# Altium PCB Auxillary_Supply_UCC28740.PcbDoc
Units mm, origin at the board's own origin, x right, y up, seen from the top; angles counter-clockwise.
Board outline 100 x 50 mm, 2 copper layers (Top Layer, Bottom Layer); 76 components, 39 nets, 241 pads, 246 vias.
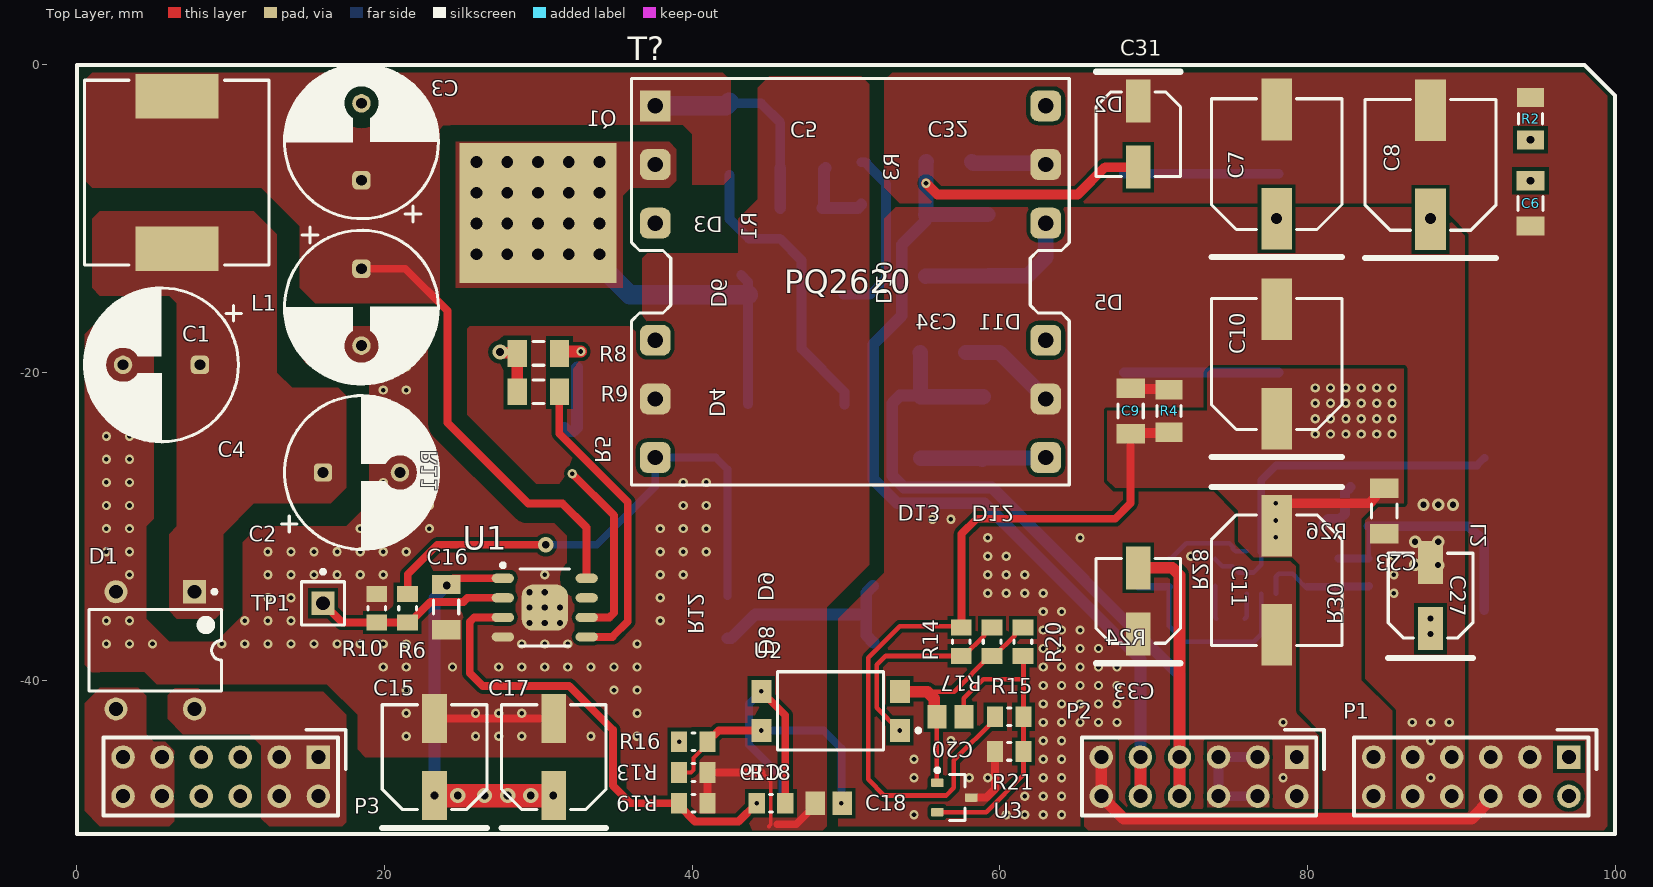
[diagram p0: Top Layer view]
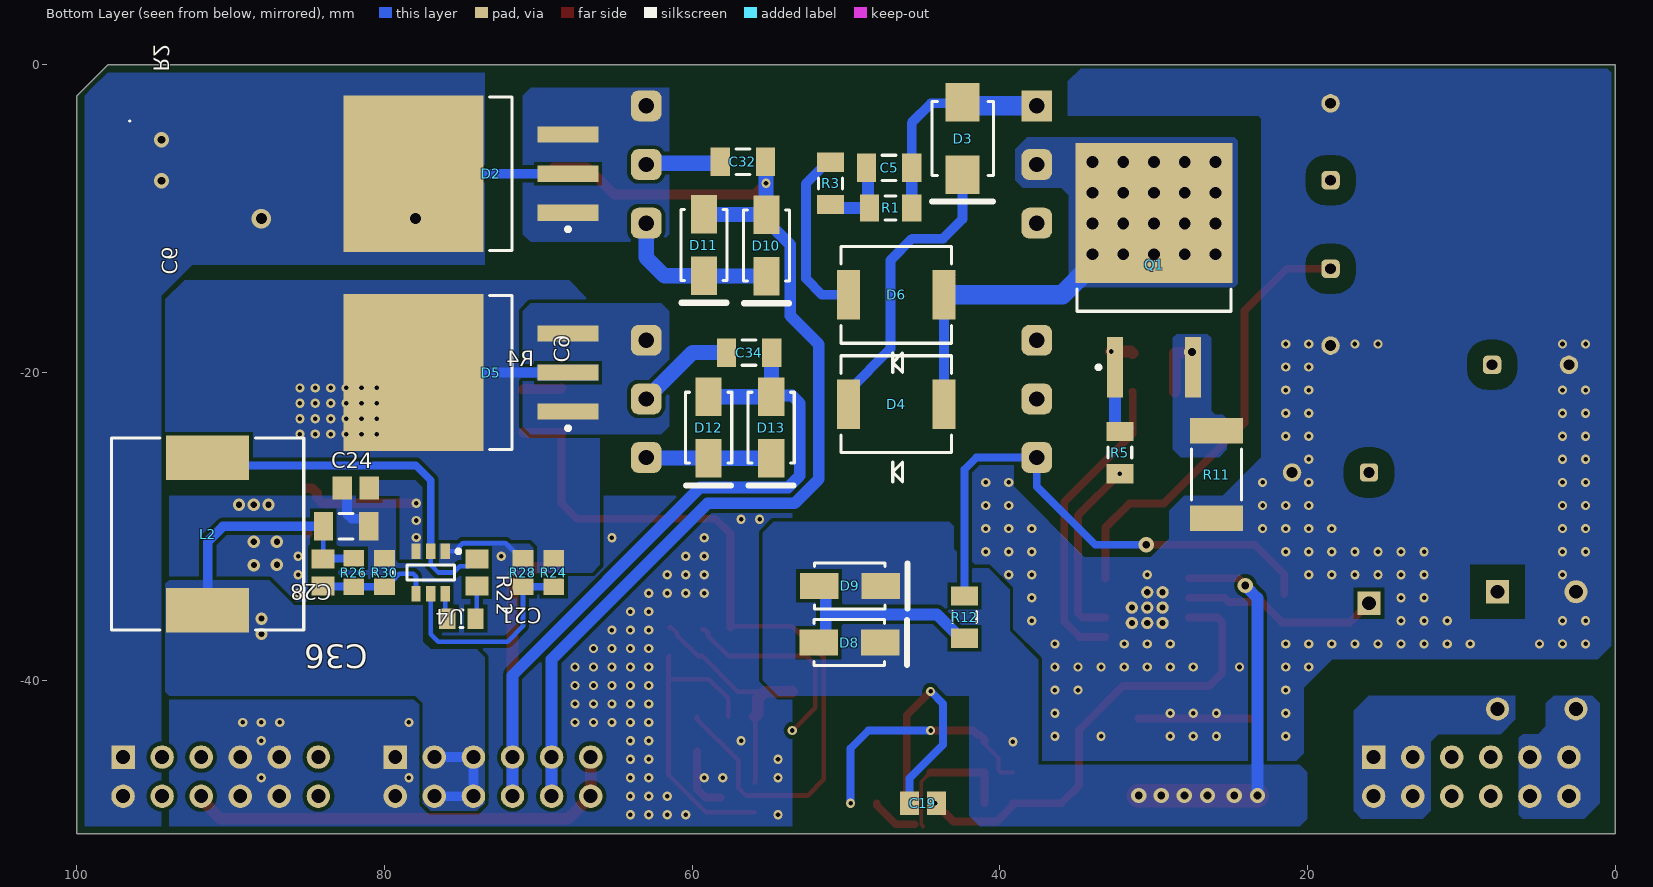
[diagram p1: Bottom Layer view, seen from below]
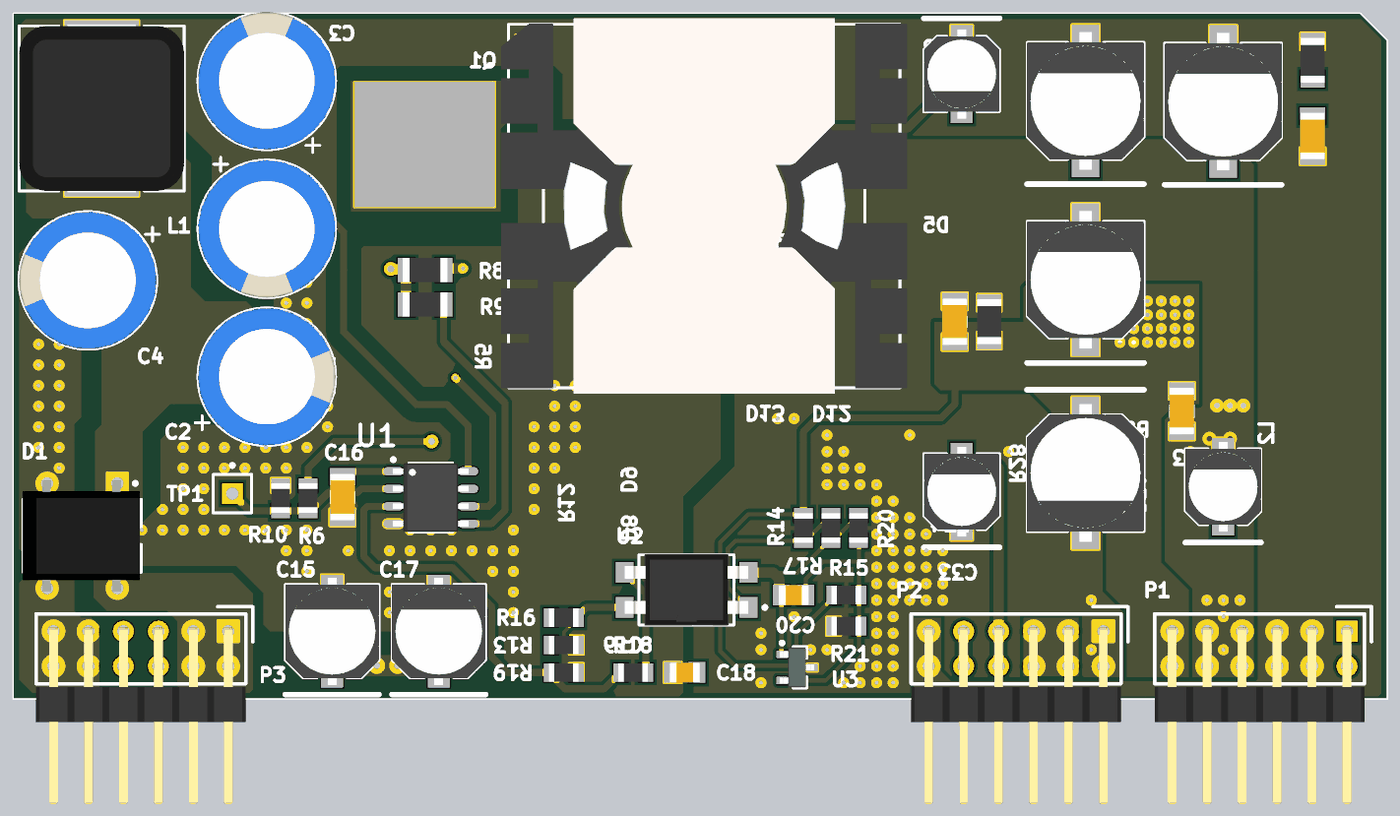
[diagram p2: 3D render of the assembled board from above, using the file's embedded part models]
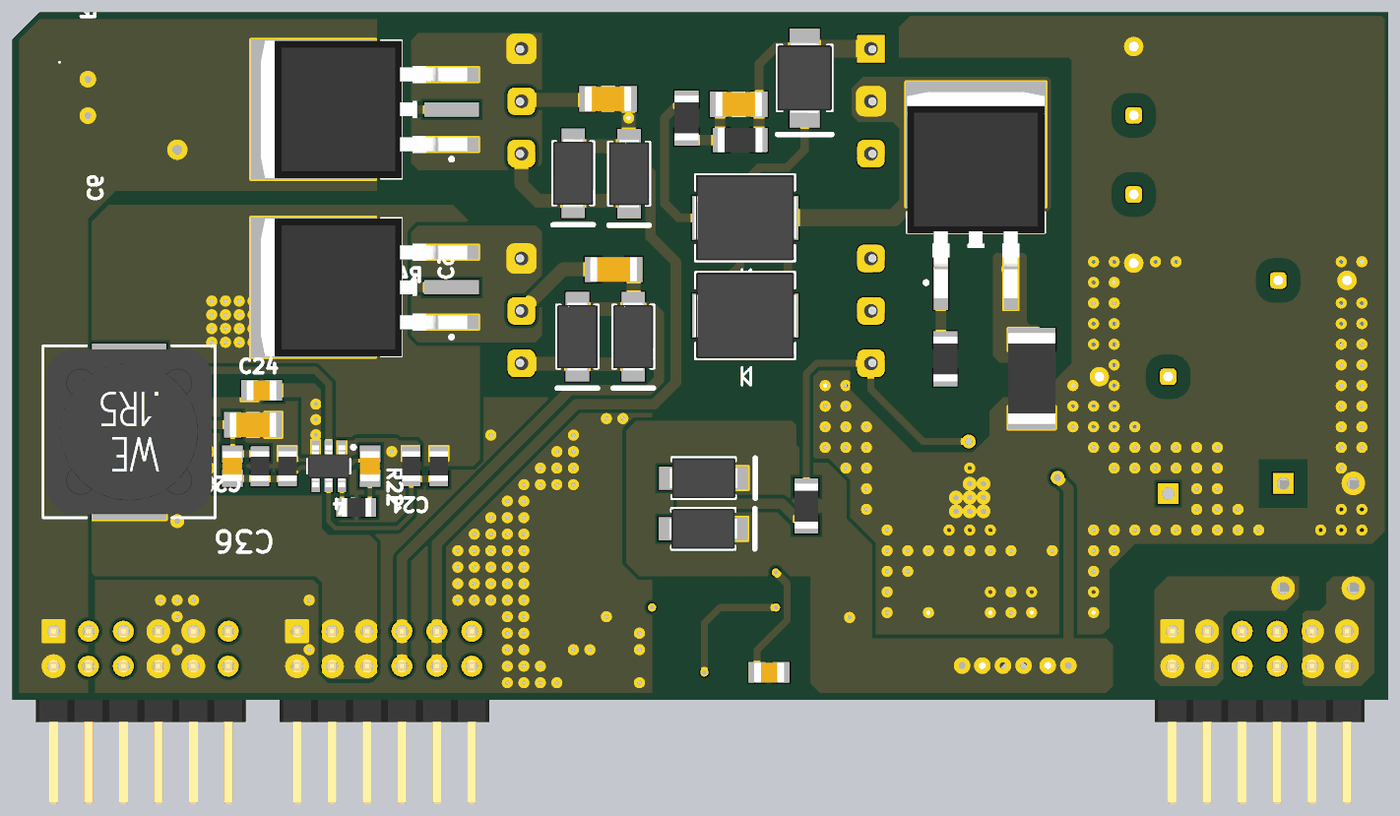
[diagram p3: 3D render of the assembled board from below, using the file's embedded part models]

## Layer stack, top to bottom
Top Solder: solder mask 0.0254, SM-001, Dk 4
Top Layer: signal copper 0.0356
Dielectric 1: dielectric 0.32, FR-4, Dk 4.8
Bottom Layer: signal copper 0.0356
Bottom Solder: solder mask 0.0254, SM-001, Dk 4

## Board outline
0,-50 0,0 98,0 100,-2 100,-50

## Design rules (kind name [scope] priority, off if disabled: settings)
AssemblyTestPointUsage [InNet('No Net')] p1:
AssemblyTestpoint [InNet('No Net')] p1: testpointundercomponent=TRUE minsize=1.016 maxsize=2.54 preferedsize=1.524 minholesize=0 maxholesize=1.016 preferedholesize=0.813 testpointgrid=0.025 usegrid=TRUE gridtolerance=0 allowsidetop=TRUE allowsidebottom=TRUE
Clearance "Schematic Clearance Constraint" [InNetClass('HV')] p1: gap=1.016 ignorepadtopadclearanceinfootprint=FALSE except(0.635: Arc-SMDPad Arc-Via Track-SMDPad Track-Via SMDPad-SMDPad SMDPad-Via)
Clearance Clearance_9 [All] p2: gap=0.254 ignorepadtopadclearanceinfootprint=FALSE except(0: Arc-Hole Track-Hole SMDPad-Hole THPad-Hole Via-Hole Fill-Hole Poly-Hole Region-Hole Text-Hole)
Clearance Clearance_8 [InNamedPolygon('GNDB')] p3: gap=0.254 ignorepadtopadclearanceinfootprint=FALSE except(0: Arc-Hole Track-Hole SMDPad-Hole THPad-Hole Via-Hole Fill-Hole Poly-Hole Region-Hole Text-Hole)
Clearance Clearance_7 [InNamedPolygon('GNDB')] p4: gap=0.254 ignorepadtopadclearanceinfootprint=FALSE except(0: Arc-Hole Track-Hole SMDPad-Hole THPad-Hole Via-Hole Fill-Hole Poly-Hole Region-Hole Text-Hole)
Clearance Clearance_6 [InNamedPolygon('GNDB')] p5: gap=0.254 ignorepadtopadclearanceinfootprint=FALSE except(0: Arc-Hole Track-Hole SMDPad-Hole THPad-Hole Via-Hole Fill-Hole Poly-Hole Region-Hole Text-Hole)
Clearance Clearance_5 [InNamedPolygon('GND_AUX')] p6: gap=0.254 ignorepadtopadclearanceinfootprint=FALSE except(0: Arc-Hole Track-Hole SMDPad-Hole THPad-Hole Via-Hole Fill-Hole Poly-Hole Region-Hole Text-Hole; 1.27: Arc-Fill Arc-Poly Arc-Region Track-Fill Track-Poly Track-Region SMDPad-Fill SMDPad-Poly SMDPad-Region THPad-Fill THPad-Poly THPad-Region Via-Fill Via-Poly Via-Region Fill-Fill Fill-Poly Fill-Region Poly-Poly Poly-Region Region-Region)
Clearance Clearance_4 [InNamedPolygon('GNDAUX')] p7: gap=0.508 ignorepadtopadclearanceinfootprint=FALSE except(0: Arc-Hole Track-Hole SMDPad-Hole THPad-Hole Via-Hole Fill-Hole Poly-Hole Region-Hole Text-Hole; 0.254: Arc-Arc Arc-Track Arc-Via Arc-Text Track-Track Track-Via Track-Text SMDPad-Via SMDPad-Text THPad-THPad THPad-Via THPad-Text Via-Via Via-Text Fill-Text Poly-Text Region-Text Text-Text)
Clearance Clearance_3 [InNamedPolygon('NONET_L01_P003')] p8: gap=0.254 ignorepadtopadclearanceinfootprint=FALSE except(0: Arc-Hole Track-Hole SMDPad-Hole THPad-Hole Via-Hole Fill-Hole Poly-Hole Region-Hole Text-Hole; 1: Arc-Fill Arc-Poly Arc-Region Track-Fill Track-Poly Track-Region SMDPad-Fill SMDPad-Poly SMDPad-Region THPad-Fill THPad-Poly THPad-Region Via-Fill Via-Poly Via-Region Fill-Fill Fill-Poly Fill-Region Poly-Poly Poly-Region Region-Region)
Clearance Clearance_2 [InNamedPolygon('HV1')] p9: gap=0.254 ignorepadtopadclearanceinfootprint=FALSE except(0: Arc-Hole Track-Hole SMDPad-Hole THPad-Hole Via-Hole Fill-Hole Poly-Hole Region-Hole Text-Hole)
Clearance Soldermask [InNamedPolygon('Top')] p10: gap=0.254 ignorepadtopadclearanceinfootprint=FALSE except(0: Arc-Hole Track-Hole SMDPad-Hole THPad-Hole Via-Hole Fill-Hole Poly-Hole Region-Hole Text-Hole; 0.5: Arc-Poly Track-Fill Track-Poly SMDPad-Fill SMDPad-Poly THPad-Fill THPad-Poly Via-Fill Via-Poly Fill-Fill Fill-Poly Poly-Poly)
Clearance Clearance_1 [InNamedPolygon('Top')] p11: gap=0.254 ignorepadtopadclearanceinfootprint=FALSE except(0: Arc-Hole Track-Hole SMDPad-Hole THPad-Hole Via-Hole Fill-Hole Poly-Hole Region-Hole Text-Hole; 0.5: Arc-Arc Arc-Track Track-Track)
Clearance [InNet('No Net')] p12: gap=0.254 ignorepadtopadclearanceinfootprint=FALSE except(0: Arc-Hole Track-Hole SMDPad-Hole THPad-Hole Via-Hole Fill-Hole Poly-Hole Region-Hole Text-Hole)
FabricationTestPointUsage [All] p1: valid=0 allowmultiple=TRUE
FabricationTestpoint [All] p1: side=3 testpointundercomponent=FALSE minsize=1.016 maxsize=2.54 preferedsize=1.524 minholesize=0 maxholesize=1.016 preferedholesize=0.813 testpointgrid=0.025 allowsidetop=TRUE allowsidebottom=TRUE usegrid=TRUE gridtolerance=0
Height [All] p1: minheight=0 maxheight=27.94 prefheight=12.7
MinimumSolderMaskSliver [All] p1: minsoldermaskwidth=0.127
PolygonConnect [All] p1: connectstyle=Direct reliefconductorwidth=0.254 reliefentries=4 polygonreliefangle="90 Angle" airgapwidth=0.254
RoutingVias [All] p1: holewidth=0.3 width=0.6 viastyle="Through Hole" minholewidth=0.3 minwidth=0.6 maxholewidth=1 maxwidth=2
SilkToSilkClearance [All] p1: silktosilkclearance=0.2
SilkToSolderMaskClearance [IsPad] p1: minsilkscreentomaskgap=0.2 clearancetoexposedcopper=TRUE
SolderMaskExpansion [All] p1: expansion=0.102 istentingtop=FALSE
UnRoutedNet [All] p1: checkbadconnections=TRUE
Width [All] p1: maxlimit=1.524 minlimit=0.254 preferedwidth=0.762 minimp=50.000000 maximp=50.000000 favimp=50.000000
21 further rules are at their usual default settings.

## Classes and differential pairs
net class HV: HV LIVE NetC1_1 NetD4_1

## Components (designator, comment, footprint, x,y, rotation, side; value= is the part's Value field where it differs from the comment)
C1 "400V" 10UF_400V 8,-19.5 r180 top value=10uF
C2 "400V" 10UF_400V 16,-26.5 r0 top value=10uF
C3 "400V" 10UF_400V 18.5,-7.5 r90 top value=10uF
C4 "400V" 10UF_400V 18.5,-13.25 r270 top value=10uF
C5 "Cap_1206" CHIP_CAP_1206 47.2,-6.7 r180 bottom value=100pF
C6 "Cap_1206" CHIP_CAP_1206 94.5,-9 r90 top value=100pF
C7 "100uF" PNSC-FK-V-F_V 78,-6.45 r90 top
C8 "100uF" PNSC-FK-V-F_V 88,-6.5 r90 top
C9 "Cap_1206" CHIP_CAP_1206 68.5,-22.5 r270 top value=100pF
C10 "100uF" PNSC-FK-V-F_V 78,-19.45 r90 top
C11 "100uF" PNSC-FK-V-F_V 78,-33.5 r270 top
C15 "47uF" PNSC-FP-V-D_V 23.25,-45 r90 top
C16 "Cap_1206" CHIP_CAP_1206 24,-35.25 r90 top value=100nF
C17 "47uF" PNSC-FP-V-D_V 31,-45 r90 top
C18 "Cap_0805" CHIP_CAP_0805 48.875,-48 r0 top value=100pF
C19 "Cap_0805" CHIP_CAP_0805 45,-48 r180 bottom value=100pF
C20 "Cap_0805" CHIP_CAP_0805 56.79,-42.38 r0 top value=100pF
C21 "Cap_0805" CHIP_CAP_0805 74,-33 r90 bottom value=100pF
C23 "Cap_1206" CHIP_CAP_1206 85,-29 r270 top value=10uF
C24 "Cap_0805" CHIP_CAP_0805 81.875,-27.5 r0 bottom value=100pF
C27 "EEEFP1E220AR" PNSC-FP-V-C_V 88,-34.5 r90 top
C28 "Cap_1206" CHIP_CAP_1206 82.5,-30 r180 bottom value=100nF
C31 "EEEFP1E220AR" PNSC-FP-V-C_V 69,-4.5 r270 top
C32 "Cap_1206" CHIP_CAP_1206 56.7,-6.3 r180 bottom value=100nF
C33 "EEEFP1E220AR" PNSC-FP-V-C_V 69,-34.85 r90 top
C34 "Cap_1206" CHIP_CAP_1206 56.3,-18.7 r180 bottom value=100nF
C36 "Cap_0805" CHIP_CAP_0805 84,-33 r90 bottom value=100pF
D1 "DF10M" DF10M 5.09,-38.062 r270 top
D2 "STPS3030C6" DPAK254P1542X450-4N 74.422,-7.074 r0 bottom
D3 "SMBJ33A" FAIR-DO-214AA-2_V 42.418,-4.788 r270 bottom
D4 "SS36-E3/57T" VISH-DO-214AB-2_V 46.736,-22.06 r0 bottom
D5 "STPS3030C6" DPAK254P1542X450-4N 74.422,-20 r0 bottom
D6 "SS36-E3/57T" VISH-DO-214AB-2_V 46.736,-14.948 r0 bottom
D8 "B360A-13-F" DIOD-B360A_V 49.784,-37.554 r180 bottom
D9 "B360A-13-F" DIOD-B360A_V 49.752,-33.871 r180 bottom
D10 "B360A-13-F" DIOD-B360A_V 55.172,-11.742 r270 bottom
D11 "B360A-13-F" DIOD-B360A_V 59.236,-11.71 r270 bottom
D12 "B360A-13-F" DIOD-B360A_V 58.928,-23.584 r270 bottom
D13 "B360A-13-F" DIOD-B360A_V 54.864,-23.584 r270 bottom
L1 "CDRH127NP-100MC" SUMI-CDRH127_V 6.5,-7 r180 top
L2 "5.6uH" WE-PD-L 91.5,-30.5 r270 bottom
P1 "Header 6X2H" HEADER_6X2 97,-45 r270 top
P2 "Header 6X2H" HEADER_6X2 79.3,-45 r270 top
P3 "Header 6X2H" HEADER_6X2 15.7,-45 r270 top
Q1 "NMOS-2" "DPAK254P1542X450-3N - THERMAL" 29.972,-13.314 r90 bottom
R1 "Res_1206" CHIP_RES_1206 47.1,-9.3 r180 bottom value=1K
R2 "Res_1206" CHIP_RES_1206 94.5,-3.5 r270 top value=10K
R3 "Res_1206" CHIP_RES_1206 51,-7.7 r270 bottom value=1K
R4 "Res_1206" CHIP_RES_1206 71,-22.5 r270 top value=10K
R5 "Res_1206" CHIP_RES_1206 32.2,-25.2 r90 bottom value=10E
R6 "Res_0805" CHIP_RES_0805 21.5,-35.325 r90 top value=105K
R8 "Res_1206" CHIP_RES_1206 30,-18.75 r0 top value=10K
R9 "Res_1206" CHIP_RES_1206 30,-21.25 r180 top value=1.5K
R10 "Res_0805" CHIP_RES_0805 19.5,-35.325 r270 top value=28.7K
R11 "Res_2512" CHIP2PINSM127P600-8N_2512 25.908,-26.632 r90 bottom value=0.56E
R12 "Res_1206" CHIP_RES_1206 42.291,-35.903 r90 bottom value=JUMPER
R13 "Res_0805" CHIP_RES_0805 40.075,-46 r0 top value=10K
R14 "Res_0805" CHIP_RES_0805 57.5,-37.5 r90 top value=1K
R15 "Res_0805" CHIP_RES_0805 60.615,-42.38 r0 top value=180K
R16 "Res_0805" CHIP_RES_0805 40.075,-44 r180 top value=1E
R17 "Res_0805" CHIP_RES_0805 59.5,-37.5 r90 top value=1K
R18 "Res_0805" CHIP_RES_0805 45.125,-48 r0 top value=205K
R19 "Res_0805" CHIP_RES_0805 40.075,-48 r180 top value=18.7K
R20 "Res_0805" CHIP_RES_0805 61.5,-37.5 r90 top value=NC
R21 "Res_0805" CHIP_RES_0805 60.615,-44.63 r0 top value=39K
R22 "Res_0805" CHIP_RES_0805 75,-36 r0 bottom value=105K
R24 "Res_0805" CHIP_RES_0805 69,-33 r90 bottom value=15.49K
R26 "Res_0805" CHIP_RES_0805 82,-33 r90 bottom value=105K
R28 "Res_0805" CHIP_RES_0805 71,-33 r270 bottom value=5.49K
R30 "Res_0805" CHIP_RES_0805 80,-33 r270 bottom value=105K
T? "PQ2620_AB" PQ26_20 50.292,-14.097 r0 top
TP1 "Test Point" PIN1 16,-35 r0 top
U1 "UCC28740-Q1" SOIC127P570X175_HS-9N 30.418,-35.282 r0 top
U2 "PC817" LTV-817 49,-42 r180 top
U3 "TL431ACDBZR" DBZ0003A_L 57.04,-47.63 r0 top
U4 "TPS56339DDCR" SOT95P278X110-6N 77,-33 r270 bottom value=Value

## Footprints (in the part's own frame and the unit in brackets; to place one, negate y for a bottom-side part, rotate by r counter-clockwise, add the part's x,y. Pads: shape width x height; smd on the part's side, far side on the other; paste and mask are expansions set on the pad)
10UF_400V [mm]
  rrect50% 1.2x1.2 hole 0.7: 1(0,0)
  round 1.2 hole 0.7: 2(5,0)
  silkscreen extent -2.7,-5 7.5,5, body extent -2.5,-5 7.5,5, height 10.5
CHIP2PINSM127P600-8N_2512 [mm]
  rect 1.65x3.45 smd: 1(-2.85,0) 2(2.85,0)
  silkscreen extent -1.65,-1.63 1.65,1.63, body extent -3.3,-1.71 3.3,1.71, height 0.8
CHIP_CAP_0805 [mm]
  rect 1.25x1.5 smd: 1(-0.875,0) 2(0.875,0)
  body extent -1.1,-0.72 1.1,0.72, height 1.2
CHIP_CAP_1206 [mm]
  rect 1.25x1.85 smd: 1(-1.475,0) 2(1.475,0)
  silkscreen extent -0.45,-0.82 0.45,0.82, body extent -1.7,-0.9 1.7,0.9, height 1.4
CHIP_RES_0805 [mm]
  rect 1.05x1.35 smd: 1(-0.925,0) 2(0.925,0)
  silkscreen extent -0.1,-0.58 0.1,0.58, body extent -1.07,-0.67 1.07,0.67, height 0.5
CHIP_RES_1206 [mm]
  rect 1.25x1.75 smd: 1(-1.375,0) 2(1.375,0)
  silkscreen extent -0.35,-0.77 0.35,0.77, body extent -1.62,-0.87 1.63,0.87, height 0.55
DBZ0003A_L [mm] "SOT23, 3-Leads, Body 3.04x1.4mm, Pitch 0.95mm, IPC High Density"
  rrect18% 0.8x0.55 smd: 1(-1.1,0.95) 2(-1.1,-0.95) 3(1.1,0)
  silkscreen extent -1.22,-1.5 0.7,1.9, body extent -1.26,-1.46 1.26,1.46, height 0.96
DF10M [mm]
  rect 1.5x1.5 hole 0.9: 1(-3.81,2.55)
  round 1.5 hole 0.9: 2(-3.81,-2.55) 3(3.81,-2.55) 4(3.81,2.55)
  silkscreen extent -3.93,-4.3 2.65,4.3, body extent -4.01,-4.32 4.01,4.18, height 3.5
DIOD-B360A_V [mm] "Molded Diode, 2-Leads, Body 4.60x2.92mm"
  rect 2.5x1.7 smd: 1(-2,0) 2(2,0)
  silkscreen extent -2.3,-1.5 3.75,1.5, body extent -2.52,-1.46 2.52,1.46, height 2.3
"DPAK254P1542X450-3N - THERMAL" [mil] "D2-PAK, 3-Pads, Body 7.60x8.36mm (max), IPC Medium Density"
  rect 155.51x41.34 smd: 1(-250,100) 3(-250,-100)
  round 60 hole 30: 2(39.37,-157.48) 2(39.37,-78.74) 2(39.37,0) 2(39.37,78.74) 2(39.37,157.48) 2(118.11,-157.48) 2(118.11,-78.74) 2(118.11,0) 2(118.11,78.74) 2(118.11,157.48) 2(196.85,-157.48) 2(196.85,-78.74) 2(196.85,0) 2(196.85,78.74) 2(196.85,157.48) 2(275.59,-157.48) 2(275.59,-78.74) 2(275.59,0) 2(275.59,78.74) 2(275.59,157.48)
  rect 358.27x401.57 smd far side: 2(145.67,0)
  rect 358.27x401.57 smd: 2(145.67,0)
  silkscreen extent -255,-197 -49,197, body extent -295,-197 295,197, height 184
DPAK254P1542X450-4N [mm] "D2-PAK, 3-Pads, Body 7.60x8.36mm (max), IPC Medium Density"
  rect 3.95x1.05 smd: 1(-6.35,-2.54) 1(-6.35,2.54) 2(-6.35,0)
  rect 9.1x10.2 smd: 2(3.7,0)
  silkscreen extent -6.47,-5 -1.25,5, body extent -7.5,-5 7.5,5, height 4.42
FAIR-DO-214AA-2_V [mm] "Molded Diode, 2-Leads, Body 4.75x3.95mm"
  rect 2.5x2.2 smd: 1(-2.35,0) 2(2.35,0)
  silkscreen extent -2.4,-2 4.1,2, body extent -2.59,-1.97 2.6,1.98, height 2.65
HEADER_6X2 [mil]
  rect 60x60 hole 35.43: 1(0,0)
  round 60 hole 35.43: 2(100,0) 3(0,-100) 4(100,-100) 5(0,-200) 6(100,-200) 7(0,-300) 8(100,-300) 9(0,-400) 10(100,-400) 11(0,-500) 12(100,-500)
  silkscreen extent -70,-550 150,70, body extent -13,-550 495,50, height 200
LTV-817 [mm]
  rect 1.3x1.5 smd: 1(-4.5,1.27) 2(-4.5,-1.27) 3(4.5,-1.27) 4(4.5,1.27)
  silkscreen extent -5.83,-2.55 3.45,2.55, body extent -4.48,-2.6 4.48,2.6, height 3.68
PIN1 [mm] "Connector; Plug"
  rect 1.5x1.5 hole 0.9: 1(0,0)
  silkscreen extent -1.4,-1.4 1.4,2.17
PNSC-FK-V-F_V [mm] "CAPAE, 2-Leads, Body 8.50x8.50mm"
  rect 4x2 smd: 1(-3.55,0) 2(3.55,0)
  silkscreen extent -6.05,-4.25 4.25,4.25, body extent -5,-4.25 5,4.25, height 10.5
PNSC-FP-V-C_V [mm] "CAPAE, 2-Leads, Body 5.50x5.50mm"
  rect 2.8x1.6 smd: 1(-2.15,0) 2(2.15,0)
  silkscreen extent -4.05,-2.75 2.75,2.75, body extent -3.25,-2.75 3.25,2.75, height 6.1
PNSC-FP-V-D_V [mm] "CAPAE, 2-Leads, Body 6.80x6.80mm"
  rect 3.2x1.6 smd: 1(-2.5,0) 2(2.5,0)
  silkscreen extent -4.6,-3.4 3.4,3.4, body extent -3.9,-3.4 3.9,3.4, height 6.1
PQ26_20 [mm]
  rect 2x2 hole 1: 1(-12.7,11.43)
  rrect50% 2x2 hole 1: 2(-12.7,7.62) 3(-12.7,3.81) 4(-12.7,-3.81) 5(-12.7,-7.62) 6(-12.7,-11.43) 7(12.7,-11.43) 8(12.7,-7.62) 9(12.7,-3.81) 10(12.7,3.81) 11(12.7,7.62) 12(12.7,11.43)
  silkscreen extent -14.22,-13.21 14.22,13.21, body extent -14.75,-13.65 14.75,13.65, height 22.65
SOIC127P570X175_HS-9N [mm] "SOIC, 8-Leads, Body 4.91x3.90mm, Pitch 1.27mm, Thermal Pad 3.00x3.00mm, IPC Medium Density"
  oval 1.45x0.6 smd: 1(-2.725,1.905) 2(-2.725,0.635) 3(-2.725,-0.635) 4(-2.725,-1.905) 5(2.725,-1.905) 6(2.725,-0.635) 7(2.725,0.635) 8(2.725,1.905)
  round 0.8 hole 0.4: 9(-1,-1) 9(-1,0) 9(-1,1) 9(0,-1) 9(0,0) 9(0,1) 9(1,-1) 9(1,0)
  rrect50% 3x3 smd: 9(0,0)
  silkscreen extent -2.85,-2.5 1.6,2.88, body extent -2.77,-2.5 2.77,2.5, height 1.75
SOT95P278X110-6N [mm] "SOT23, 6-Leads, Body 2.90x2.78mm, Pitch 0.95mm, IPC Medium Density"
  rect 1x0.6 smd: 1(-1.375,0.95) 2(-1.375,0) 3(-1.375,-0.95) 4(1.375,-0.95) 5(1.375,0) 6(1.375,0.95)
  silkscreen extent -1.5,-1.55 0.5,1.92, body extent -1.52,-1.53 1.53,1.53, height 1.1
SUMI-CDRH127_V [mm] "SMD, 2-Leads, Body 12x12mm"
  rect 5.4x2.9 smd: 1(0,4.95) 2(0,-4.95)
  silkscreen extent -6,-6 6,6, body extent -6,-6.1 6,6.1, height 8.4
VISH-DO-214AB-2_V [mm] "Molded Diode, 2-Leads, Body 7.11x6.22mm"
  rect 1.52x3.2 smd: 1(-3.105,0) 2(3.105,0)
  silkscreen extent -3.6,-3.15 3.6,5.04, body extent -3.77,-3.11 3.78,3.11, height 2.62
WE-PD-L [mm] "SMD Inductor, 2-Leads, Body 12.0 x 12.0 mm"
  rect 2.9x5.4 smd: 1(-4.95,0) 2(4.95,0)
  silkscreen extent -6.25,-6.25 6.25,6.25, body extent -6,-6 6,6, height 5.98

## Part data
C1 C2 C3 C4: library part "Cap Pol1", "Polarized Capacitor (Radial)", LatestRevisionDate=17-Jul-2002, LatestRevisionNote="Re-released for DXP Platform.", PackageDescription="Polarized Capacitor (Radial); 2 Leads", PackageReference=RB7.6-15, Published=8-Jun-2000, Publisher="Altium Limited"
C5 C6 C9 C16 C18 C19 C20 C21 C23 C24 C28 C32 C34 C36: library part Cap, "Capacitor", LatestRevisionDate=17-Jul-2002, LatestRevisionNote="Re-released for DXP Platform.", PackageDescription="Radial Cap, Thru-Hole; 2 Leads; 0.3 in Pin Spacing", PackageReference=RAD-0.3, Published=8-Jun-2000, Publisher="Altium Limited"
  C18 C19 C21 C24 C36: Size=100nF
  C20: Size=1.2nF
C7 C8 C10 C11: library part CMP-2000-06208-1, "Aluminum Electrolytic Capacitor, 100 uF, +/- 20%, 50 V, 2-Pin SMD (Size Code F), -55 to 105 degC, RoHS, Tape and Reel", Capacitance=100µF, Case Size/Dimension=Ø8x10.2mm, Lifetime@Temperature=2000Hrs@105°C, Manufacturer=Panasonic, Operating Temp Range=-55to+105°C, Operating Temp-Max=105°C, Package Description="2-Pin Electrolytic Aluminum Capacitor, Body 8.3 x 8.3 mm", Package Reference=FK-V-F, Rated Voltage=50V, Ripple Current=350mA, Datasheet URL=http://industrial.panasonic.com/cdbs/www-data/pdf/RDE0000/ABA0000C1181.pdf, Datasheet Version=03/2016, Impedance=0.34O, Manufacturer URL=http://www.panasonic.com/, Mounting Technology=SurfaceMount, Package URL=http://industrial.panasonic.com/cdbs/www-data/pdf/RDE0000/DME0000COL48.pdf, Series=FK, Type=Can
C15 C17: library part CMP-2000-06216-1, "Aluminum Electrolytic Capacitor, 47 uF, +/- 20%, 35 V, 2-Pin SMD (Size Code D), -55 to 105 degC, RoHS, Tape and Reel", Capacitance=47µF, Case Size/Dimension=Ø6.3x5.8mm, ESR (Equivalent Series Resistance)=0.26O, Lifetime@Temperature=2000Hrs@105°C, Manufacturer=Panasonic, Operating Temp Range=-55to+105°C, Operating Temp-Max=105°C, Package Description="2-Pin Electrolytic Aluminum Capacitor, Body 6.6 x 6.6 mm", Package Reference=FP-V-D, Rated Voltage=35V, Ripple Current=300mA, Datasheet URL=http://industrial.panasonic.com/cdbs/www-data/pdf/RDE0000/ABA0000C1184.pdf, Datasheet Version=03/2016, Manufacturer URL=http://www.panasonic.com/, Mounting Technology=SurfaceMount, Package URL=http://industrial.panasonic.com/cdbs/www-data/pdf/RDE0000/DME0000COL48.pdf, Series=FP, Type=Can
C27 C31 C33: library part CMP-2000-06213-1, "Aluminum Electrolytic Capacitor, 22 uF, +/- 20%, 25 V, 2-Pin SMD (Size Code C), -55 to 105 degC, RoHS, Tape and Reel", Capacitance=22µF, Case Size/Dimension=Ø5x5.8mm, ESR (Equivalent Series Resistance)=0.36O, Lifetime@Temperature=2000Hrs@105°C, Manufacturer=Panasonic, Operating Temp Range=-55to+105°C, Operating Temp-Max=105°C, Package Description="2-Pin Electrolytic Aluminum Capacitor, Body 5.3 x 5.3 mm", Package Reference=FP-V-C, Rated Voltage=25V, Ripple Current=240mA, Datasheet URL=http://industrial.panasonic.com/cdbs/www-data/pdf/RDE0000/ABA0000C1184.pdf, Datasheet Version=03/2016, Manufacturer URL=http://www.panasonic.com/, Mounting Technology=SurfaceMount, Package URL=http://industrial.panasonic.com/cdbs/www-data/pdf/RDE0000/DME0000COL48.pdf, Series=FP, Type=Can
D2 D5: library part 11DQ06, "Schottky Rectifier", Code_JEDEC=DO-204-AL, ComponentLink1Description="Manufacturer Link", ComponentLink1URL=http://www.irf.com/, ComponentLink2Description=Datasheet, ComponentLink2URL=http://www.irf.com/product-info/datasheets/data/11dq05.pdf, DatasheetVersion=Dec-1997, LatestRevisionDate=17-Jul-2002, LatestRevisionNote="Re-released for DXP Platform.", PackageDescription="Diode, Axial; Body 5.2 x 2.7 mm (LxDia. max), Lead Dia. 0.86 mm (max)", PackageReference=DO-204AL, Published=8-Jun-2000, Publisher="Altium Limited"
D3: library part CMP-2000-07095-1, "Transient Voltage Suppressor, 600 W, 33 V, -55 to 150 degC, 2-Pin SMD, RoHS, Tape and Reel", Manufacturer=FairchildSemiconductor, Maximum Clamping Voltage=53.3V, Maximum Peak Pulse Current=11.3A, Maximum Reverse Leakage Current=5uA, Maximum Reverse Stand-off Voltage=33V, Minimum Breakdown Voltage=36.7V, Operating Temperature=-55to150°C, Package=2DO-214AA, Package Description="2-Pin Surface Mount Device, Body 4.4 x 3.625 mm", Package Reference=DO-214AA-2, Peak Pulse Power Dissipation=600W, Test Current=1mA, Category=TVS, Configuration=Single, Datasheet URL=https://www.fairchildsemi.com/datasheets/SM/SMBJ33A.pdf, Datasheet Version="Rev. 1.1.1, 11/2014", Direction Type=Uni-Directional, Manufacturer URL=https://www.fairchildsemi.com/, Mounting=SurfaceMount, Mounting Technology=SurfaceMount, Packaging=Tape&Reel, Rad Hard=No
D4 D6: library part CMP-2000-07150-1, "Surface Mount Schottky Barrier Rectifier, 60 V, 3 A, -55 to 150 degC, 2-Pin SMC (DO-214AB), RoHS, Tape and Reel", Diode Case Style=DO-214AB, Forward Current If(AV)=3A, Forward Surge Current Ifsm Max=100A, Forward Voltage VF Max=750mV, Manufacturer=Vishay, Operating Temperature Max=150°C, Package Description="2-Pin Surface Mount Device, Body 6.855 x 5.905 mm", Repetitive Reverse Voltage Vrrm Max=60V, Datasheet URL=http://www.vishay.com/docs/88751/ss32.pdf, Datasheet Version=08/2015, Diode Configuration=Single, Diode Type=Schottky, Manufacturer URL=http://www.vishay.com/, Mounting Technology=SurfaceMount, No. of Pins=2Pins, Package Reference=DO-214AB, Packaging=CutTape, Product Range=-, SVHC=ToBeAdvised
D8 D9 D10 D11 D12 D13: library part CMP-2000-05898-1, "Schottky Barrier Rectifier, 3 A, -55 to 150 degC, 2-Pin Molded, RoHS, Tape and Reel", If - Forward Current=3A, Ifsm - Forward Surge Current=80A, Ir - Reverse Current=500uA, Manufacturer=DiodesIncorporated, Maximum Operating Temperature=+125C, Minimum Operating Temperature=-55C, Operating Temperature Range=-55Cto+125C, Package / Case=SMA, Package Description="2-Pin Surface Mount Device, Body 4.3 x 2.605 mm", Package Reference=B360A, Vf - Forward Voltage=0.7V, Vrrm - Repetitive Reverse Voltage=60V, Brand=DiodesIncorporated, Configuration=Single, Datasheet URL=https://datasheet.ciiva.com/914/ds30891-914080.pdf, Datasheet Version="Rev. 15-2, 09/2014", Factory Pack Quantity=5000, Height=2.3mm, Length=4.6mm, Manufacturer URL=http://www.diodes.com/, Mounting Style=SMD/SMT, Mounting Technology=SurfaceMount, Packaging=Reel, Product=SchottkyDiodes, Product Category=SchottkyDiodes&Rectifiers, RoHS=True, Series=B360, Technology=Si, Termination Style=SMD/SMT, Type=SchottkyBarrierRectifier, Unit Weight=0.002258oz, Width=2.92mm
L1: library part CMP-2000-06084-1, "Power Inductor, 10 uH, +/- 20%, -40 to 100 degC, 2-Pin SMD, RoHS, Tape and Reel", Current - Saturation=-, Current Rating=5.4A, DC Resistance (DCR)=21.6mOhmMax, Frequency - Test=1kHz, Inductance=10µH, Manufacturer=Sumida, Operating Temperature=-40°C~100°C, Package / Case=Nonstandard, Package Description="2-Pin Surface Mount Device, Body 12 x 12 mm", Package Reference=CDRH127, Standard Package=1, Tolerance=±20%, Catalog Drawings=CDRH127SeriesFrontCDRH127SeriesSideCDRH127SeriesBottom, Category=Inductors,Coils,Chokes, Datasheet URL=http://products.sumida.com/products/pdf/CDRH127.pdf, Datasheet Version=01/2014, Family=FixedInductors, Frequency - Self Resonant=-, Height - Seated (Max)="0.315\"(8.00mm)", Manufacturer URL=http://www.sumida.com/, Material - Core=-, Mounting Technology=SurfaceMount, Mounting Type=SurfaceMount, Online Catalog=CDRHSeries, Other Names=308-1457-1, Packaging=CutTape(CT), Product Training Modules=PowerInductorBasics, Q @ Freq=-, Ratings=-, Series=CDRH127, Shielding=Shielded, Size / Dimension="0.472\"Lx0.472\"W(12.00mmx12.00mm)", Type=-
L2: library part CMP-0227-00698-1, "SMD-Shielded Power Inductor WE-PD, L = 4.70 µH", Inductance="4.70 ÂµH", ComponentLink1Description="Manufacturer Link", ComponentLink1URL=http://www.we-online.com, ComponentLink2Description=Datasheet, ComponentLink2URL=http://www.we-online.de/katalog/media/pdf/744771004.pdf, DatasheetVersion="ver 7, Sep-2006", PackageDescription="SMD Inductor, 2-Leads, Body 12.0 x 12.0 mm", PackageReference=WE-PD-L, PackageVersion=2006
P1 P2 P3: "Header, 6-Pin, Dual row, Right Angle", LatestRevisionDate=17-Jul-2002, LatestRevisionNote="Re-released for DXP Platform.", Publisher="Altium Limited"
Q1: "N-Channel Power MOSFET", ComponentLink1Description="Manufacturer Link", ComponentLink1URL=http://www.irf.com/, DatasheetVersion=PD-9.814, LatestRevisionDate=17-Jul-2002, LatestRevisionNote="Re-released for DXP Platform.", Note="Pin 2 is electrically connected to pin 4.", PackageDescription="TO, Thru-Hole, Vertical, Heatsink Mounted; 3 In-Line Leads; Pitch 2.54 mm", PackageReference=TO-220AB, PackageVersion=Feb-1997, Published=8-Jun-2000, Publisher="Altium Limited"
R1 R2 R3 R4 R5 R6 R8 R9 R10 R11 R12 R13 R14 R15 R16 R17 R18 R19 R20 R21 R22 R24 R26 R28 R30: library part Res1, "Resistor", LatestRevisionDate=17-Jul-2002, LatestRevisionNote="Re-released for DXP Platform.", PackageDescription="Axial Device, Thru-Hole; 2 Leads; 0.3 in Pin Spacing", PackageReference=AXIAL-0.3, Published=8-Jun-2000, Publisher="Altium Limited"
TP1: library part Socket, LatestRevisionDate=17-Jul-2002, LatestRevisionNote="Re-released for DXP Platform.", Publisher="Altium Limited"
U2: library part Optoisolator1, "4-Pin Phototransistor Optocoupler", DatasheetVersion=Nov-2003, LatestRevisionDate=04-Mar-2005, LatestRevisionNote="Sch pins 3 & 4 Swapped.", PackageReference=DIP-4, Published=24-Mar-1999, Publisher="Altium Limited"
U3: library part CMP-0366-01028-2, "Adjustable Precision Shunt Regulator, 34 ppm / degC, 100 mA, 0 to 70 degC, 3-pin SOT-23 (DBZ), Green (RoHS & no Sb/Br)", Manufacturer="Texas Instruments", Rating=Catalog, Temp Coeff(Typ)(ppm/ degree C)=34, Code_JEDEC=TO-236, ComponentLink1Description="Manufacturer URL", ComponentLink1URL=http://www.ti.com/, ComponentLink2Description=Datasheet, ComponentLink2URL=http://www.ti.com/general/docs/lit/getliterature.tsp?genericPartNumber=TL431A&fileType=pdf, ComponentLink3Description="Package Specification", ComponentLink3URL=http://www.ti.com/litv/pdf/mpds108a, DatasheetVersion=SLVS543M, Eco-Plan="Green (RoHS & no Sb/Br)", Initial Accuracy @ 25/deg C(%)=1, Iout/Iz(Max)(mA)=100, Min Iz for Regulation(uA)=600, Mounting Technology="Surface Mount", PackageDescription="3-Pin Plastic Small Outline, Body 2.92 x 1.3 mm, Pitch 0.95 mm", PackageReference=DBZ0003A, PackageVersion=4203227/B, PartNumber=TL431ACDBZR, SubFamily="Shunt Voltage Reference", VO Adj(Max)(V)=36, VO Adj(Min)(V)=2.495
U4: "Imported", Manufacturer="Texas Instruments", Manufacturer_Name="Texas Instruments", Manufacturer_Part_Number=TPS56339DDCR, PartNumber=TPS56339DDCR, RefDes=RefDes, Type=TYPE

## Via types
v1: diameter 0.6, hole 0.3, Top Layer to Bottom Layer, 224 vias
v2: diameter 1, hole 0.5, Top Layer to Bottom Layer, 11 vias
v3: diameter 0.8, hole 0.4, Top Layer to Bottom Layer, 9 vias
v4: diameter 1.27, hole 0.711, Top Layer to Bottom Layer, 2 vias

## Nets (pads, with @x,y where several pads share a name; then routed paths per layer and width w, separated by ;. In a path a pad name is that pad's centre, name@x,y a point inside that pad or via, vN(x,y) a via of type N, cw(c..) or ccw(c..) an arc to the next point about the centre after c; other vN are vias at no path point)
5V_B: C27.1 C28.1 C36.2 L2.2 P2.3 P2.4 P2.5 P2.6 R26.2 | length 24.1
  Bottom Layer w0.305: C36.2@83.975,-32.1 C28.1
  Bottom Layer w0.508: R26.2 82.025,-32.1 C36.2@83.975,-32.1
  Bottom Layer w0.635: P2.4 P2.6 P2.5 P2.3 ; C28.1 90.5,-30 91.5,-31 L2.2
  other v3: 88,-37 88,-36
15V_A: C6.2 C7.1 C8.1 D2.2 P1.1 P1.2 R2.2 | length 10.1
  Bottom Layer w0.635: D2.2@68.072,-7.074 D2.2@78.122,-7.074
  other v2: 94.5,-7.525 94.5,-4.875
  other v4: 78,-10 88,-10
15V_B: C9.2 C10.1 C11.1 C23.1 C24.1 D5.2 P1.11 P1.12 R4.2 R14.2 R15.1 R24.2 U4.3 | length 69.4
  Top Layer w0.305: R14.2 57.425,-36.5 53.5,-36.5 51.444,-38.556 51.444,-46.444 52.5,-47.5 56.5,-47.5 57,-47 57,-45.22 59.69,-42.53 R15.1
  Top Layer w0.508: R14.2 57.5,-30.5 58.5,-29.5 67.5,-29.5 68.5,-28.5 C9.2
  Top Layer w0.635: C9.2 68.55,-23.925 70.95,-23.925 R4.2 ; C11.1@77.95,-28.497 84.021,-28.497 84.393,-28.125 84.393,-27.832 84.7,-27.525 C23.1
  Bottom Layer w0.635: D5.2@68.072,-20 D5.2@78.122,-20
  other v1: 77.933,-30.72 77.933,-29.618 77.933,-28.497 80.5,-24 81.5,-24 82.5,-24 83.5,-24 84.5,-24 85.5,-24 80.5,-23 81.5,-23 82.5,-23 83.5,-23 84.5,-23 85.5,-23 80.5,-22 81.5,-22 82.5,-22 83.5,-22 84.5,-22 85.5,-22 80.5,-21 81.5,-21 82.5,-21 83.5,-21 84.5,-21 85.5,-21
-5V_A: C31.2 C32.2 D10.1 D11.1 P2.9 P2.10 | length 74.6
  Top Layer w0.635: v1(55.199,-7.696) 55.937,-8.434 65.066,-8.434 66.85,-6.65 C31.2
  Top Layer w0.762: P2.10 P2.9
  Bottom Layer w0.762: D10.1 55.172,-10.142 53.625,-11.689 53.625,-16.317 51.769,-18.174 51.769,-26.924 53.345,-28.5 59,-28.5 69.14,-38.64 P2.9 P2.10
  Bottom Layer w1: D10.1 D10.1@55.188,-9.726 ; C32.2 55.199,-6.326 v1(55.199,-7.696) 55.199,-9.715 D10.1@55.188,-9.726 ; D11.1@59.22,-9.726 D10.1@55.188,-9.726
-5V_B: C33.2 C34.2 D12.1 D13.1 P2.7 P2.8 | length 62.9
  Top Layer w0.762: C33.2 71.201,-32.7 71.68,-33.179 P2.8
  Bottom Layer w0.762: D13.1@54.845,-21.564 54.78,-21.5 53.5,-21.5 53,-22 53,-26.718 53.751,-27.469 59.469,-27.469 71.68,-39.68 P2.7 P2.8
  Bottom Layer w1: C34.2 54.845,-18.719 54.845,-21.564 D13.1 D12.1
CS: R9.1 U1.5 | length 19.9
  Top Layer w0.508: R9.1 31.358,-21.267 31.358,-23.958 35.814,-28.414 35.814,-36.186 34.813,-37.187 U1.5
DRV: R5.1 U1.6 | length 12.1
  Top Layer w0.508: v1(32.2,-26.575) 34.925,-29.3 34.925,-35.62 34.627,-35.917 U1.6
FB: C19.2 R18.1 R19.2 U1.3 | length 31
  Top Layer w0.508: U1.3 25.836,-35.917 25.538,-36.215 25.538,-39.538 26.382,-40.382 32.001,-40.382 34.844,-43.225 34.844,-46.844 36,-48 R19.2 39.15,-48.15 40.183,-49.183 43.017,-49.183 v1(44.2,-48)
  Bottom Layer w0.508: C19.2 v1(44.2,-48)
GNDA: C6.1 C7.2 C8.2 C31.1 C32.1 P1.3 P1.4 P1.5 P1.6 P2.11 P2.12 R2.1 T?.11 | length 34.1
  Top Layer w0.762: P2.11 P2.12 68.06,-49 90.666,-49 91.92,-47.746 P1.6
  Bottom Layer w1: C32.1 58.264,-6.388 62.903,-6.388 T?.11
GNDAUX: C1.2 C2.2 C3.2 C4.2 C15.2 C16.1 C17.2 C18.1 D1.2 R10.1 R11.1 R13.2 R19.1 T?.5 U1.4 U1.9 | length 20.1
  Top Layer w0.254: 44.5,-46 45.106,-46.606 45.106,-49.394 45,-49.5
  Top Layer w0.508: C15.2 C17.2 ; R19.1 R13.2 44.5,-46 ; 45.54,-49.365 46.76,-49.365 48,-48.125 C18.1
  other v1: 21.418,-43.644 25.918,-43.644 27.418,-43.644 28.918,-43.644 33.418,-43.644 36.418,-43.644 21.418,-42.144 25.918,-42.144 27.418,-42.144 28.918,-42.144 36.418,-42.144 21.418,-40.644 34.918,-40.644 36.418,-40.644 19.918,-39.144 21.418,-39.144 24.418,-39.144 27.418,-39.144 28.918,-39.144 30.418,-39.144 31.918,-39.144 33.418,-39.144 34.918,-39.144 36.418,-39.144 1.918,-37.644 3.418,-37.644 4.918,-37.644 9.418,-37.644 10.918,-37.644 12.418,-37.644 13.918,-37.644 15.418,-37.644 16.918,-37.644 18.418,-37.644 19.918,-37.644 21.418,-37.644 28.918,-37.644 30.418,-37.644 31.918,-37.644 36.418,-37.644 1.918,-36.144 3.418,-36.144 10.918,-36.144 12.418,-36.144 13.918,-36.144 37.918,-36.144 12.418,-34.644 13.918,-34.644 37.918,-34.644 3.418,-33.144 12.418,-33.144 13.918,-33.144 15.418,-33.144 16.918,-33.144 18.418,-33.144 19.918,-33.144 30.418,-33.144 37.918,-33.144 39.418,-33.144 1.918,-31.644 3.418,-31.644 12.418,-31.644 13.918,-31.644 15.418,-31.644 16.918,-31.644 18.418,-31.644 19.918,-31.644 21.418,-31.644 37.918,-31.644 39.418,-31.644 40.918,-31.644 1.918,-30.144 3.418,-30.144 18.418,-30.144 19.918,-30.144 21.418,-30.144 22.918,-30.144 37.918,-30.144 39.418,-30.144 40.918,-30.144 1.918,-28.644 3.418,-28.644 19.918,-28.644 21.418,-28.644 22.918,-28.644 39.418,-28.644 40.918,-28.644 1.918,-27.144 3.418,-27.144 19.918,-27.144 22.918,-27.144 39.418,-27.144 40.918,-27.144 1.918,-25.644 3.418,-25.644 19.918,-25.644 1.918,-24.144 3.418,-24.144 19.918,-24.144 21.418,-24.144 1.918,-22.644 3.418,-22.644 19.918,-22.644 21.418,-22.644 1.918,-21.144 3.418,-21.144 19.918,-21.144 21.418,-21.144 19.918,-19.644 21.418,-19.644 1.918,-18.144 3.418,-18.144 15.418,-18.144 16.918,-18.144 19.918,-18.144 21.418,-18.144
GNDB: C9.1 C10.2 C11.2 C23.2 C24.2 C27.2 C28.2 C33.1 C34.1 P1.7 P1.8 P1.9 P1.10 P2.1 P2.2 R4.1 R21.1 R28.1 R30.1 T?.8 U3.3 U4.1 | length 22.8
  Top Layer w0.508: U3.3 59.135,-47.63 59.69,-47.075 R21.1
  Top Layer w0.635: C9.1 68.55,-21.075 70.95,-21.075 R4.1 ; C23.2 C23.2@85.05,-30.425
  Bottom Layer w0.305: R28.1 71.15,-32.075 72.131,-31.094 74.918,-31.094 75.156,-31.332 75.156,-31.446 75.335,-31.625 U4.1
  Bottom Layer w0.635: C28.2 81.025,-29.807 81.333,-29.5 82.128,-29.5 82.442,-29.186 82.442,-27.808 C24.2 C24.2@82.8,-27.45
  Bottom Layer w1: C34.1 59.975,-18.7 T?.8
  other v1: 54.418,-48.744 60.418,-48.744 61.618,-48.744 62.818,-48.744 64.018,-48.744 61.618,-47.544 62.818,-47.544 64.018,-47.544 54.418,-46.344 58.018,-46.344 59.218,-46.344 62.818,-46.344 64.018,-46.344 78.418,-46.344 88.018,-46.344 54.418,-45.144 62.818,-45.144 64.018,-45.144 56.818,-43.944 62.818,-43.944 64.018,-43.944 88.018,-43.944 62.818,-42.744 64.018,-42.744 65.218,-42.744 66.418,-42.744 67.618,-42.744 78.418,-42.744 86.818,-42.744 88.018,-42.744 89.218,-42.744 62.818,-41.544 64.018,-41.544 65.218,-41.544 66.418,-41.544 67.618,-41.544 62.818,-40.344 64.018,-40.344 65.218,-40.344 66.418,-40.344 67.618,-40.344 62.818,-39.144 64.018,-39.144 65.218,-39.144 66.418,-39.144 67.618,-39.144 62.818,-37.944 64.018,-37.944 65.218,-37.944 66.418,-37.944 62.818,-36.744 64.018,-36.744 65.218,-36.744 62.818,-35.544 64.018,-35.544 59.218,-34.344 60.418,-34.344 61.618,-34.344 62.818,-34.344 85.618,-34.344 59.218,-33.144 60.418,-33.144 61.618,-33.144 85.618,-33.144 59.218,-31.944 60.418,-31.944 72.418,-31.944 85.618,-31.944 59.218,-30.744 65.218,-30.744 55.618,-29.544 56.818,-29.544
  other v3: 88.497,-32.521 87,-32.5 87,-31 88.5,-31 87.542,-28.598 88.5,-28.598 89.467,-28.598
HV: C3.1 C4.1 C5.2 D3.1 L1.2 R1.2 T?.1 U1.8 | length 43.5
  Top Layer w0.508: C4.1 21.35,-13.25 24.089,-15.989 24.089,-23.263 29.341,-28.515 31.563,-28.515 33.125,-30.077 U1.8@33.125,-33.395
  Bottom Layer w0.635: D3.1 42.48,-2.5 44.471,-2.5 45.725,-3.754 C5.2
  Bottom Layer w0.762: R1.2 C5.2
  Bottom Layer w1.27: T?.1 42.189,-2.667 D3.1
LIVE: D1.3 P3.9 P3.10 P3.11 P3.12
NetC1_1: C1.1 C2.1 D1.1 L1.1
NetC5_1: C5.1 R1.1 R3.2 | length 5.3
  Bottom Layer w0.762: C5.1 48.574,-6.801 48.574,-9.201 R1.1 50.775,-9.3 R3.2
NetC18_2: C18.2 R13.1 R16.1 U2.4 | length 16.4
  Top Layer w0.254: R13.1 39.926,-46 40.094,-45.832 40.094,-45.056 41,-44.15 R16.1
  Top Layer w0.508: R16.1 41,-43.85 41.271,-43.579 41.421,-43.579 41.73,-43.27 v1(44.5,-43.27) ; v1(49.7,-48) C18.2
  Bottom Layer w0.508: v1(44.5,-43.27) 44.508,-43.278 48.548,-43.278 49.7,-44.43 v1(49.7,-48)
NetC19_1: C19.1 R18.2 U2.3 | length 16.4
  Top Layer w0.508: v1(44.5,-40.73) 46.05,-42.28 R18.2
  Bottom Layer w0.508: v1(44.5,-40.73) 43.692,-41.538 43.692,-44.192 45.875,-46.375 C19.1
NetC20_1: C20.1 R17.1 R20.2 U2.2 U3.1 | length 17.8
  Top Layer w0.3: U2.2@53.52,-40.75 55.293,-40.75 57.025,-40.75 59.35,-38.425 R17.1 59.65,-38.425 60.975,-37.1 60.975,-36.95 61.35,-36.575 R20.2 ; C20.1 55.901,-42.394 55.901,-44.767 55.9,-46.555 55.94,-46.595 U3.1
  Top Layer w0.762: U2.2 53.52,-40.75 55.293,-40.75 55.739,-41.196 55.739,-42.204 C20.1
NetC20_2: C20.2 R15.2 R20.1 R21.2 U3.2 | length 19.9
  Top Layer w0.3: U3.2 59.116,-48.58 61.54,-46.156 R21.2 R15.2 61.54,-39.934 ; C20.2 57.665,-41.18 58.911,-39.934 61.54,-39.934 ; R20.1 61.54,-38.465 61.54,-39.934
NetC21_1: C21.1 R22.1 | length 2.2
  Bottom Layer w0.305: C21.1 74,-35.925 R22.1
NetC21_2: C21.2 L2.1 U4.2 | length 24.2
  Bottom Layer w0.305: C21.2 74.473,-32.598 75.098,-32.598 75.5,-33 76.5,-33 77,-32.5 U4.2
  Bottom Layer w0.508: U4.2 77,-27 77.965,-26.035 91.015,-26.035 L2.1
NetC36_1: C36.1 R26.1 R30.2 U4.4 | length 7.6
  Bottom Layer w0.305: U4.4 77.95,-33.268 78.129,-33.089 79.038,-33.089 79.477,-33.529 79.477,-33.552 79.85,-33.925 R30.2
  Bottom Layer w0.508: R30.2 R26.1 82.025,-33.9 83.975,-33.9 C36.1
NetD2_1: D2.1 T?.12
NetD3_2: D3.2 D4.2 | length 19.2
  Bottom Layer w0.635: D3.2 42.418,-10.028 43.69,-11.3 45.7,-11.3 47.1,-12.7 47.1,-18.45 49.91,-21.26 D4.2@49.91,-22.1
NetD4_1: D4.1 D6.1 Q1.2 T?.2 | length 22.8
  Top Layer w1.524: Q1.2@29.972,-9.614 30.226,-9.868 Q1.2@32.972,-9.868
  Bottom Layer w0.635: D6.1@43.189,-13.665 43.631,-14.108 D6.1 D4.1
  Bottom Layer w1.27: Q1.2@33.972,-12.314 34.021,-12.363 34.021,-13.021 35.948,-14.948 D6.1
NetD5_1: D5.1 T?.9
NetD6_2: D6.2 R3.1 | length 11.6
  Bottom Layer w0.635: D6.2 51.552,-14.948 52.606,-13.894 52.606,-7.724 51.558,-6.676 51.558,-6.632 51.25,-6.325 R3.1
NetD8_1: D8.1 D9.1 R12.1 | length 13.7
  Bottom Layer w0.762: R12.1 42.541,-37.278 44.093,-35.726 51.308,-35.726 ; D9.1 51.308,-34.315 51.308,-35.726 ; D8.1 51.777,-37.554 51.308,-37.085 51.308,-35.726
NetD10_2: D10.2 D11.2 T?.10 | length 10.6
  Bottom Layer w1: D10.2 55.188,-13.726 59.22,-13.726 D11.2 61.79,-13.71 62.992,-12.508 T?.10
NetD12_2: D12.2 D13.2 T?.7 | length 8.1
  Bottom Layer w1: D13.2 58.8,-25.584 D12.2@58.864,-25.648 ; D12.2 58.957,-25.555 62.964,-25.555 T?.7
NetQ1_1: Q1.1 R5.2 R8.2 | length 6.4
  Top Layer w0.762: R8.2 31.494,-18.631 v1(32.766,-18.631)
  Bottom Layer w0.75: R5.2@31.7,-23.575 R5.2@31.95,-23.825
  Bottom Layer w0.762: R5.2@31.95,-23.825 R5.2 32.268,-23.825 32.512,-23.581 Q1.1
NetQ1_3: Q1.3 R8.1 R9.2 R11.2 | length 3.6
  Top Layer w0.75: v2(27.512,-18.664) 27.555,-18.707 28.582,-18.707 R8.1 R9.2
NetR14_1: R14.1 R17.2 U2.1 | length 13.3
  Top Layer w0.3: v1(53.5,-43.27) 53.468,-43.27 52,-41.802 52,-39 52.575,-38.425 R14.1 57.65,-38.425 58.975,-37.1 58.975,-36.91 59.18,-36.705 R17.2@59.33,-36.705
NetR22_2: R22.2 U4.6 | length 1.7
  Bottom Layer w0.305: R22.2 76.05,-35.875 U4.6
NetR24_1: R24.1 R28.2 U4.5 | length 13.8
  Bottom Layer w0.305: R28.2 71,-36.5 72,-37.5 76.5,-37.5 77,-37 U4.5
  Bottom Layer w0.508: R24.1 R28.2
NEUTRAL: D1.4 P3.1 P3.2 P3.3 P3.4
VCC_AUX: C15.1 C16.2 C17.1 D8.2 D9.2 R16.2 U1.1 | length 25.7
  Top Layer w0.508: C16.2 C16.2@24.036,-33.811 ; U1.1 24.469,-33.377 C16.2@24.036,-33.811 ; C16.2@24.036,-33.811 v2(24.036,-33.843) C16.2@24.036,-33.811
  Top Layer w1.524: v2(23.25,-47.5) C17.1
  Bottom Layer w0.762: v2(23.25,-47.5) 23.25,-34.661 24.036,-33.875 v2(24.036,-33.843)
  other v1: 39.15,-44
  other v2: 24.75,-47.5 26.5,-47.5 28,-47.5 29.5,-47.5 30.975,-47.5
VS: R6.1 R10.2 TP1.1 U1.2 | length 12.9
  Top Layer w0.508: TP1.1 17.25,-36.25 R10.2 R6.1 21.65,-36.25 22.992,-34.908 25.135,-34.908 25.396,-34.647 U1.2
VS_Feed: R6.2 R12.2 T?.6 | length 34.9
  Top Layer w0.5: R6.2 21.5,-33.125 23.421,-31.204 v2(30.48,-31.204)
  Bottom Layer w0.5: v2(30.48,-31.204) 33.796,-31.204 37.592,-27.408 T?.6 41.527,-25.527 42.291,-26.291 R12.2
pads on no net: P3.5 P3.6 P3.7 P3.8 T?.3 T?.4 U1.7

## Polygon pours and split planes (outlines as drawn)
5V_B on Top Layer "5V_B_L01_P009" (solid, pour order 9): 73.5,-44 73.495,-44.005 73.495,-48.265 77.485,-48.265 77.5,-48.249 77.5,-44
15V_B on Top Layer "15V_B_L01_P008" (solid, pour order 8): 81,-49.5 85.5,-49.5 85.5,-42 83.5,-40 83.5,-29.5 84.5,-28.5 86.25,-28.5 86.25,-19.75 73.75,-19.75 73.5,-20 73.5,-22.5 67,-22.5 67,-27 67.5,-27.5 74,-27.5 75.5,-29 75.5,-31 76.5,-32 79,-32 79.5,-32.5 79.5,-42 81,-43.5
GNDB on Top Layer "GNDB_L01_P031" (solid, pour order 31): 53.241,-9.259 88.393,-9.259 90.241,-11.107 90.241,-49.5 49.5,-49.5 49.5,-36 52.5,-33 52.5,-10
GNDA on Top Layer "GNDA_L01_P029" (solid, pour order 29): 65.75,-49.75 99.25,-49.75 99.5,-49.5 99.5,-2 98,-0.5 53,-0.5 52.5,-1 52.5,-8 53.5,-9 88.5,-9 90.5,-11 90.5,-48.5 90.388,-48.612 67.672,-48.612 67.5,-48.44 67.5,-44 65.5,-44 65.5,-49.5
NetD4_1 on Top Layer "NETD4_1_L01_P010" (solid, pour order 10): 35.5,-14.5 35.5,-8.5 36,-8 38.5,-8 39,-7.5 39,-5.5 38.5,-5 24.5,-5 24.5,-14.5
GNDAUX on Top Layer "GNDAUX" (solid, remove dead copper, pour order 23): 5.199,-40.25 4.425,-39.475 0.975,-39.475 0.5,-39 0.5,-38 0.5,-17.5 1.25,-16.75 4.75,-16.75 5,-17 5,-29.5 4.5,-30 4.5,-36 6,-37.5 9.062,-37.5 10.781,-35.781 10.781,-31.031 11.812,-30 17.5,-30 19,-28.5 19,-20.25 18.25,-19.5 15,-19.5 14.75,-19.25 14.75,-17.25 15,-17 21.8,-17 22.808,-18.008 22.808,-22.008 23.533,-22.733 25.37,-22.733 25.37,-17.166 25.536,-17 36,-17 36.75,-16.25 36.75,-12.564 37.064,-12.25 43,-12.25 43,-10 44.25,-8.75 44.25,-1.5 45,-0.75 51,-0.75 51.5,-1.25 51.5,-32.5 48.75,-35.25 48.75,-49.5 48.5,-49.75 36.25,-49.75 35.75,-49.25 35.75,-45.75 35,-45 18.75,-45 18.25,-44.5 18.25,-42.25 16.25,-40.25
HV on Top Layer "HV2" (solid, pour order 7): 39.4,-3.9 40,-4.5 40,-7.785 42.037,-7.785 42.5,-7.328 42.5,-1 42,-0.5 1,-0.5 0.5,-1 0.5,-7.5 1,-8 12,-8 14.5,-10.5 14.5,-14.5 15.5,-15.5 23.59,-15.5 23.59,-4.172 23.81,-3.914 24.286,-3.914 24.3,-3.9
NEUTRAL on Top Layer "NEUTRAL" (solid, pour order 25): 5.893,-42.5 6.893,-43.5 7.5,-43.5 11.25,-43.5 12,-44.25 12,-49 12.5,-49.5 17.25,-49.5 17.5,-49.25 17.5,-42.25 16,-40.75 8.128,-40.75 7.874,-40.496 6.379,-40.496 5.893,-40.982
LIVE on Top Layer "LIVE" (solid, pour order 19): 5.75,-44 6.328,-44.578 6.328,-49.172 6,-49.5 1.5,-49.5 0.5,-48.5 0.5,-41.5 1,-41 1.5,-40.5 4,-40.5 4.5,-41 4.5,-43.5 5,-44
NetC1_1 on Top Layer "HV1" (solid, pour order 5): 17.5,-21.5 17,-21 14,-21 13,-20 13,-11 11.5,-9.5 1.5,-9.5 1,-10 1,-14.5 1.5,-15 6,-15 6.5,-15.5 6.5,-30 6,-30.5 6,-35.5 6.5,-36 9,-36 9.5,-35.5 9.5,-30.5 11.5,-28.5 16.5,-28.5 17.5,-27.5
NEUTRAL on Bottom Layer "NEUTRAL_L02_P033" (solid, pour order 33): 6.5,-42.551 7.449,-43.5 11.5,-43.5 12,-44 12,-48.5 12.5,-49 16.5,-49 17,-48.5 17,-42 16,-41 6.5,-41
LIVE on Bottom Layer "LIVE_L02_P032" (solid, pour order 32): 6.25,-43.75 6.25,-48.75 6,-49 2,-49 1,-48 1,-41.5 1.5,-41 4,-41 4.5,-41.5 4.5,-43 5,-43.5 6,-43.5
GNDB on Bottom Layer "GNDB_L02_P030" (solid, pour order 30): 53.5,-28 94,-28 94,-49.5 53.5,-49.5
15V_B on Bottom Layer "15V_B_L02_P028" (solid, pour order 28): 78.999,-32.153 78.999,-28.001 79,-28 81,-28 81,-27 78,-27 77.554,-27.446 77.554,-32.152 77.555,-32.153
5V_B on Bottom Layer "5V_B_L02_P027" (solid, pour order 27): 94.25,-33.75 94.25,-40.75 94,-41 78.5,-41 78,-41 77.5,-41.5 77.5,-48 77,-48.5 74,-48.5 73.5,-48 73.5,-38.5 74,-38 77,-38 77.5,-37.5 77.5,-35.129 85.871,-35.129 87.5,-33.5 94,-33.5
15V_B on Bottom Layer "15V_B_L02_P026" (solid, remove dead copper, pour order 26): 70.071,-33 70.071,-31.296 70.496,-30.871 76.482,-30.871 76.482,-26.841 77.767,-25.556 94.444,-25.556 94.5,-25.5 94.5,-15.5 93,-14 68,-14 66,-16 66,-32.5 66.5,-33
15V_A on Bottom Layer "15V_A_L02_P024" (solid, pour order 24): 94.5,-49.5 99.5,-49.5 99.5,-2 99,-1.5 98,-0.5 73.5,-0.5 73.5,-13 92.5,-13 94.5,-15
NetD2_1 on Bottom Layer "NETD2_1_L02_P022" (solid, pour order 22): 70.5,-1.5 71,-2 71,-11 70.5,-11.5 62,-11.5 61.5,-11 61.5,-1.5
NetD5_1 on Bottom Layer "NETD5_1_L02_P021" (solid, pour order 21): 71,-23.5 70.5,-24 62,-24 61.5,-23.5 61.5,-16 62,-15.5 70.5,-15.5 71,-16
NetD4_1 on Bottom Layer "NETD4_1_L02_P020" (solid, pour order 20): 24.524,-4.948 24.759,-4.713 38.213,-4.713 39,-5.5 39,-7.5 38.5,-8 36,-8 35.5,-8.5 35.5,-14.189 35.524,-14.213 35.274,-14.463 24.774,-14.463 24.524,-14.213
GNDAUX on Bottom Layer "GND_AUX" (solid, remove dead copper, pour order 18): 20.25,-44.75 20.741,-45.241 37.241,-45.241 37.241,-38.583 39.111,-36.713 39.111,-34.013 40.655,-32.469 41.623,-32.469 41.777,-32.315 41.777,-26.504 41.314,-26.041 39.108,-26.041 39.108,-27.392 34.5,-32 30.201,-32 29,-30.799 29,-29 28,-28 25.5,-28 23,-25.5 23,-3.5 23.2,-3.3 35.576,-3.3 35.576,-1.076 34.75,-0.25 0.5,-0.25 0.25,-0.5 0.25,-37.75 1.133,-38.633 18.383,-38.633 20.25,-40.5
VCC_AUX on Bottom Layer "VCC_AUX" (solid, remove dead copper, pour order 17): 20,-46.5 20,-46 20.5,-45.5 37.5,-45.5 37.5,-38.662 39.37,-36.792 39.37,-34.092 39.388,-34.092 40.734,-32.728 41.73,-32.728 43,-31.458 43,-30 43.3,-29.7 54.7,-29.7 55.4,-30.4 55.4,-40 54.4,-41 42,-41 42,-48.8 41.3,-49.5 20.5,-49.5 20,-49
NetQ1_3 on Bottom Layer "FET_Source" (solid, pour order 11): 25.25,-25 25.75,-25.5 28.25,-25.5 28.75,-25 28.75,-17.75 28.5,-17.5 26.5,-17.5 26.25,-17.75 26.25,-22.5 26,-22.75 25.5,-22.75 25.25,-23
NetD4_1 on Bottom Layer "FET_Drain" (solid, pour order 13): 35.524,-14.213 35.524,-5.028 35.209,-4.713 24.759,-4.713 24.524,-4.948 24.524,-14.213 24.774,-14.463 35.274,-14.463

## Silkscreen, mask and mechanical layers (free items; w line width, h text height)
Top Overlay:
  the board outline again, w0.254
Bottom Overlay:
  lines w0.2: 96.564,-3.647 96.564,-3.647

## Text inside footprints (layer, text, board x,y; h text height)
T?: Top Overlay "PQ2620" at 45.974,-14.859 h1.52